# Altium PCB PCB1.pcbdoc (part 3 of 4)
Units mil, origin at the board's own origin, x right, y up, seen from the top; angles counter-clockwise.
Board outline 3067 x 4292.31 mil, 4 copper layers (Top Layer, Inner1, Inner2, Bottom Layer); 120 components, 131 nets, 693 pads, 342 vias.
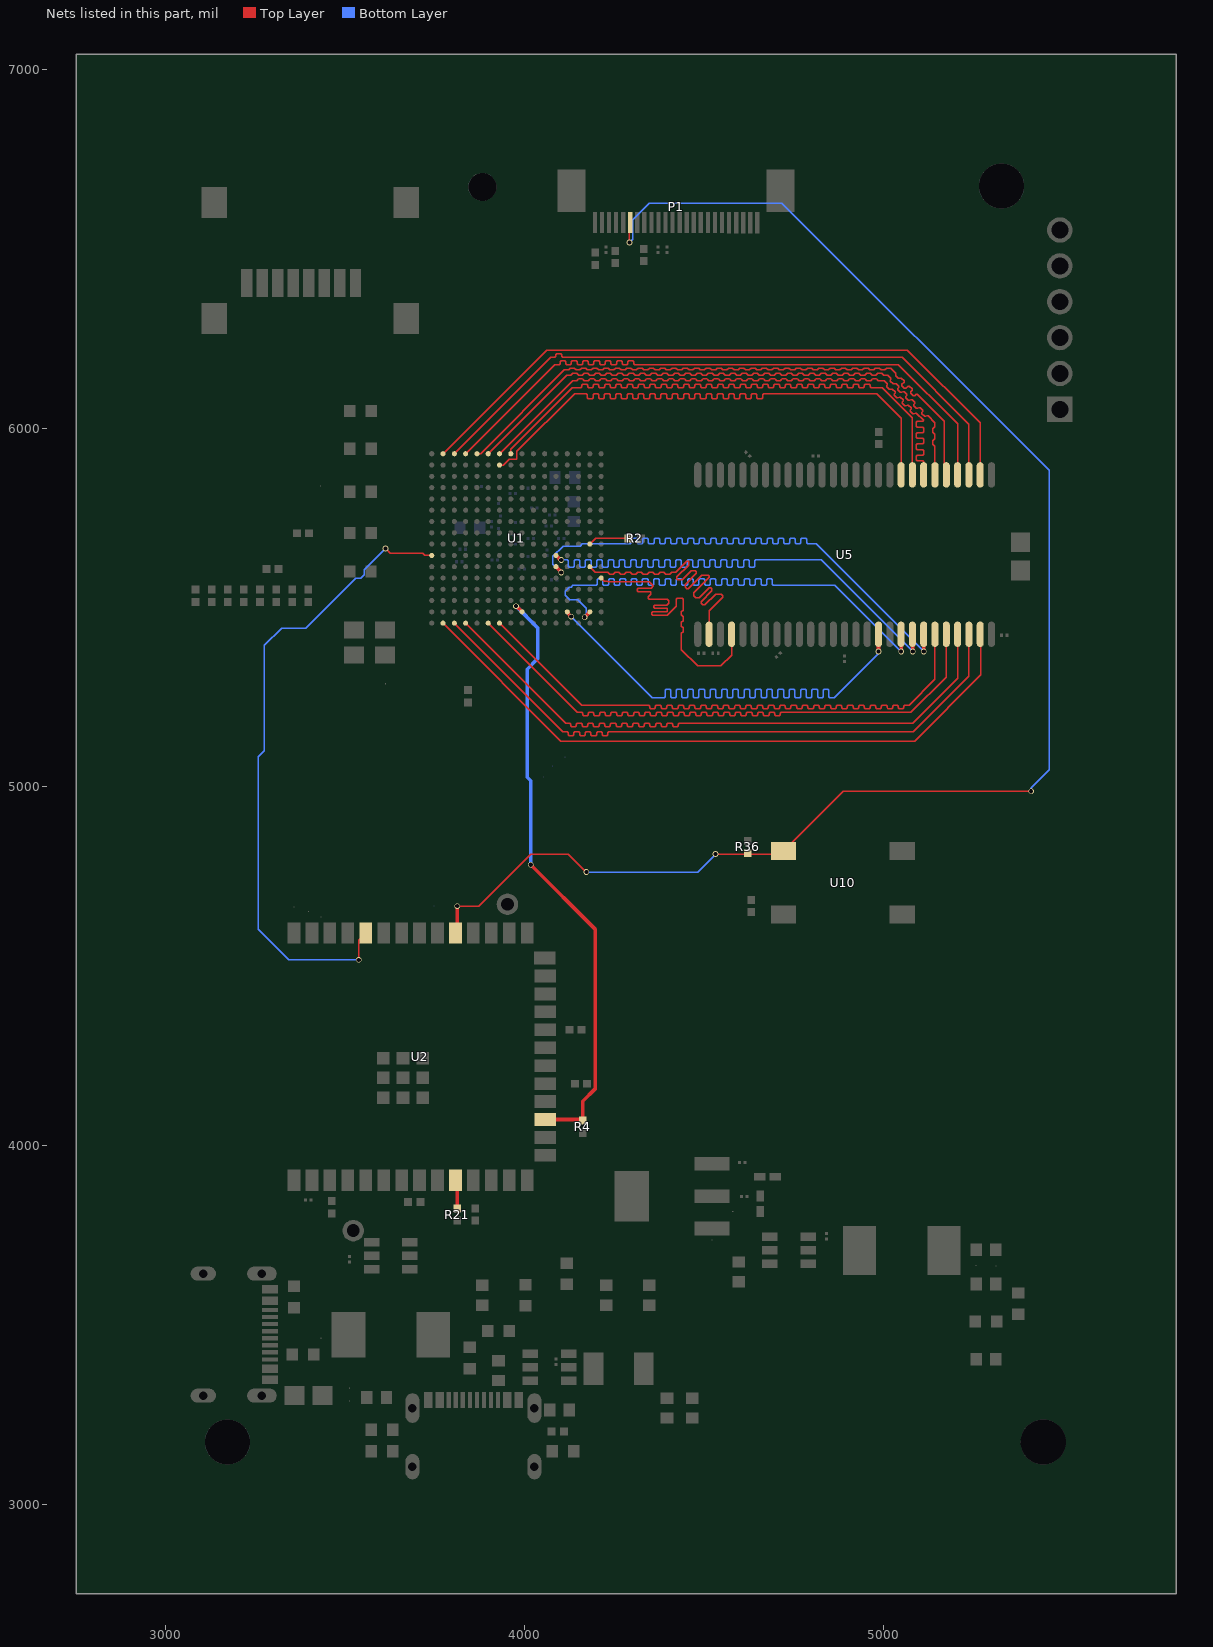
[diagram p5: the nets of this part, all layers, seen from the top]

## Via types
v1: diameter 15.75, hole 11.81, Top Layer to Bottom Layer, 336 vias
v2: diameter 19.68, hole 11.81, Top Layer to Bottom Layer, 4 vias
v3: diameter 39.37, hole 19.68, Top Layer to Bottom Layer, 2 vias

## Nets (pads, with @x,y where several pads share a name; then routed paths per layer and width w, separated by ;. In a path a pad name is that pad's centre, name@x,y a point inside that pad or via, vN(x,y) a via of type N, cw(c..) or ccw(c..) an arc to the next point about the centre after c; other vN are vias at no path point) (continued)
PROGRAMN: pad.55@4007.32,5026.48 R4.2 U1.R9 U2.17 | length 1688.8
  Top Layer w10: v1(3975.87,5503.76) 3976.9,5503.76 U1.R9@3993.07,5487.6 ; v1(4017.32,4782.31) 4196.47,4603.16 4196.47,4157.14 4162.31,4122.98 R4.2@4162.31,4069.36 4159.35,4072.32 U2.17@4062.51,4072.32
  Bottom Layer w10: v1(3975.87,5503.76) 4036.17,5443.46 4036.17,5356.46 4007.32,5327.61 pad.55@4007.32,5026.48 4017.32,5016.48 v1(4017.32,4782.31)
RESET: P1.6 R36.1 U2.31 U10.1 | length 4378.2
  Top Layer w3.94: v1(3812.12,4667.31) 3872.32,4667.31 4017.32,4812.31 4122.31,4812.31 v1(4172.31,4762.31) ; v1(4292.31,6517.31) 4292.31,6570.65 P1.6@4294.54,6572.88 ; v1(4532.31,4812.31) 4713.38,4812.31 U10.1@4721.97,4820.9 4888.38,4987.31 v1(5412.31,4987.31)
  Top Layer w10: U2.31@3812.12,4591.81 v1(3812.12,4667.31)
  Bottom Layer w3.94: v1(4172.31,4762.31) 4482.31,4762.31 v1(4532.31,4812.31) ; v1(4292.31,6517.31) 4301.22,6526.22 4301.22,6581.22 4347.31,6627.31 4717.31,6627.31 5462.31,5882.31 5462.31,5047.31 5412.31,4997.31 v1(5412.31,4987.31)
RX: U1.K1 U2.36 | length 1792.2
  Top Layer w3.94: v1(3537.32,4517.31) 3537.32,4572 U2.36@3557.12,4591.81 ; v1(3612.37,5664.48) 3625.27,5651.58 3715.77,5651.58 3722.27,5645.07 U1.K1@3741.09,5645.07
  Bottom Layer w3.94: v1(3537.32,4517.31) 3342.32,4517.31 3257.32,4602.31 3257.32,5083.73 3274.63,5101.04 3274.63,5394.63 3322.32,5442.31 3390.2,5442.31 3529.37,5581.49 3543.87,5581.49 3553.14,5590.76 3553.14,5605.26 v1(3612.37,5664.48)
SCL: R21.1 U2.10 | length 75.6
  Top Layer w10: U2.10@3812.12,3902.82 3812.32,3902.63 R21.1@3812.32,3827.32
SD_A0: U1.T6 U5.23 | length 1783
  Top Layer w3.94: U1.T6@3898.57,5456.1 4147.35,5207.31 4159.17,5207.31 4161.95,5204.53 4161.95,5200.1 4164.73,5197.31 4174.91,5197.31 4177.7,5200.1 4177.7,5204.53 4180.48,5207.31 4190.66,5207.31 4193.45,5204.53 4193.45,5200.1 4196.23,5197.31 4206.41,5197.31 4209.19,5200.1 4209.19,5204.53 4211.98,5207.31 4222.16,5207.31 4224.94,5204.53 4224.94,5200.1 4227.73,5197.31 4237.91,5197.31 4240.69,5200.1 4240.69,5204.53 4243.47,5207.31 4253.65,5207.31 4256.44,5204.53 4256.44,5200.1 4259.22,5197.31 4269.4,5197.31 4272.19,5200.1 4272.19,5204.53 4274.97,5207.31 4285.15,5207.31 4287.93,5204.53 4287.93,5200.1 4290.72,5197.31 4300.9,5197.31 4303.68,5200.1 4303.68,5204.53 4306.47,5207.31 4316.65,5207.31 4319.43,5204.53 4319.43,5200.1 4322.21,5197.31 4332.39,5197.31 4335.18,5200.1 4335.18,5204.53 4337.96,5207.31 4348.14,5207.31 4350.93,5204.53 4350.93,5200.1 4353.71,5197.31 4363.89,5197.31 4366.67,5200.1 4366.67,5204.53 4369.46,5207.31 4379.64,5207.31 4382.42,5204.53 4382.42,5200.1 4385.21,5197.31 4395.39,5197.31 4398.17,5200.1 4398.17,5204.53 4400.95,5207.31 4411.13,5207.31 4413.92,5204.53 4413.92,5200.1 4416.7,5197.31 4426.88,5197.31 4429.67,5200.1 4429.67,5204.53 4432.45,5207.31 4442.63,5207.31 4445.41,5204.53 4445.41,5200.1 4448.2,5197.31 4458.38,5197.31 4461.16,5200.1 4461.16,5204.53 4463.95,5207.31 4474.13,5207.31 4476.91,5204.53 4476.91,5200.1 4479.69,5197.31 4489.87,5197.31 4492.66,5200.1 4492.66,5204.53 4495.44,5207.31 4505.62,5207.31 4508.41,5204.53 4508.41,5200.1 4511.19,5197.31 4521.37,5197.31 4524.15,5200.1 4524.15,5204.53 4526.94,5207.31 4537.12,5207.31 4539.9,5204.53 4539.9,5200.1 4542.69,5197.31 4552.87,5197.31 4555.65,5200.1 4555.65,5204.53 4558.43,5207.31 4568.61,5207.31 4571.4,5204.53 4571.4,5200.1 4574.18,5197.31 4584.36,5197.31 4587.15,5200.1 4587.15,5204.53 4589.93,5207.31 4600.11,5207.31 4602.89,5204.53 4602.89,5200.1 4605.68,5197.31 4615.86,5197.31 4618.64,5200.1 4618.64,5204.53 4621.43,5207.31 4631.61,5207.31 4634.39,5204.53 4634.39,5200.1 4637.17,5197.31 4647.35,5197.31 4650.14,5200.1 4650.14,5204.53 4652.92,5207.31 4663.1,5207.31 4665.89,5204.53 4665.89,5200.1 4668.67,5197.31 4678.85,5197.31 4681.63,5200.1 4681.63,5204.53 4684.42,5207.31 4694.6,5207.31 4697.38,5204.53 4697.38,5200.1 4700.17,5197.31 4710.35,5197.31 4713.13,5200.1 4713.13,5204.53 4715.91,5207.31 5077.31,5207.31 5175.78,5305.78 U5.23@5175.78,5425.19
SD_A1: U1.T4 U5.24 | length 1796.6
  Top Layer w3.94: U1.T4@3835.59,5456.1 4114.36,5177.31 4126.18,5177.31 4128.96,5174.53 4128.96,5170.1 4131.74,5167.31 4141.92,5167.31 4144.71,5170.1 4144.71,5174.53 4147.49,5177.31 4157.67,5177.31 4160.46,5174.53 4160.46,5170.1 4163.24,5167.31 4173.42,5167.31 4176.2,5170.1 4176.2,5174.53 4178.99,5177.31 4189.17,5177.31 4191.95,5174.53 4191.95,5170.1 4194.74,5167.31 4204.92,5167.31 4207.7,5170.1 4207.7,5174.53 4210.48,5177.31 4220.66,5177.31 4223.45,5174.53 4223.45,5170.1 4226.23,5167.31 4236.41,5167.31 4239.2,5170.1 4239.2,5174.53 4241.98,5177.31 4252.16,5177.31 4254.94,5174.53 4254.94,5170.1 4257.73,5167.31 4267.91,5167.31 4270.69,5170.1 4270.69,5174.53 4273.48,5177.31 4283.66,5177.31 4286.44,5174.53 4286.44,5170.1 4289.22,5167.31 4299.4,5167.31 4302.19,5170.1 4302.19,5174.53 4304.97,5177.31 4315.15,5177.31 4317.94,5174.53 4317.94,5170.1 4320.72,5167.31 4330.9,5167.31 4333.68,5170.1 4333.68,5174.53 4336.47,5177.31 4346.65,5177.31 4349.43,5174.53 4349.43,5170.1 4352.22,5167.31 4362.4,5167.31 4365.18,5170.1 4365.18,5174.53 4367.96,5177.31 4378.14,5177.31 4380.93,5174.53 4380.93,5170.1 4383.71,5167.31 4393.89,5167.31 4396.68,5170.1 4396.68,5174.53 4399.46,5177.31 4409.64,5177.31 4412.42,5174.53 4412.42,5170.1 4415.21,5167.31 4425.39,5167.31 4428.17,5170.1 4428.17,5174.53 4430.96,5177.31 5082.31,5177.31 5207.31,5302.31 U5.24@5207.31,5425.15
SD_A2: U1.T3 U5.25 | length 1806.1
  Top Layer w3.94: U1.T3@3804.09,5456.1 4106.4,5153.77 4119.13,5153.77 4121.91,5150.99 4121.91,5145.1 4124.69,5142.31 4134.87,5142.31 4137.66,5145.1 4137.66,5150.99 4140.44,5153.77 4150.62,5153.77 4153.41,5150.99 4153.41,5145.1 4156.19,5142.31 4166.37,5142.31 4169.15,5145.1 4169.15,5150.99 4171.94,5153.77 4182.12,5153.77 4184.9,5150.99 4184.9,5145.1 4187.69,5142.31 4197.87,5142.31 4200.65,5145.1 4200.65,5150.99 4203.43,5153.77 4213.61,5153.77 4216.4,5150.99 4216.4,5145.1 4219.18,5142.31 4229.36,5142.31 4232.15,5145.1 4232.15,5150.99 4234.93,5153.77 5083.77,5153.77 5238.77,5308.77 U5.25@5238.77,5425.19
SD_A3: U1.T2 U5.26 | length 1826.3
  Top Layer w3.94: U1.T2@3772.59,5456.1 4101.38,5127.31 5087.31,5127.31 5272.31,5312.31 5272.31,5423.14 U5.26@5270.27,5425.19
SD_A4: U1.A2 U5.29 | length 1846.3
  Top Layer w3.94: U1.A2@3772.59,5928.53 4061.38,6217.31 5067.31,6217.31 5270.27,6014.36 U5.29@5270.27,5869.44
SD_A5: U1.A3 U5.30 | length 1778.1
  Top Layer w3.94: U1.A3@3804.09,5928.53 4072.86,6197.31 4084.68,6197.31 4087.46,6200.1 4087.46,6204.53 4090.24,6207.31 4100.42,6207.31 4103.21,6204.53 4103.21,6200.1 4105.99,6197.31 5052.31,6197.31 5238.77,6010.85 U5.30@5238.77,5869.44
SD_A6: U1.A4 U5.31 | length 1780.3
  Top Layer w3.94: U1.A4@3835.59,5928.53 4084.36,6177.31 4096.18,6177.31 4098.96,6180.1 4098.96,6184.53 4101.74,6187.31 4111.92,6187.31 4114.71,6184.53 4114.71,6180.1 4117.49,6177.31 4127.67,6177.31 4130.46,6180.1 4130.46,6184.53 4133.24,6187.31 4143.42,6187.31 4146.2,6184.53 4146.2,6180.1 4148.99,6177.31 4159.17,6177.31 4161.95,6180.1 4161.95,6184.53 4164.74,6187.31 4174.92,6187.31 4177.7,6184.53 4177.7,6180.1 4180.48,6177.31 4190.66,6177.31 4193.45,6180.1 4193.45,6184.53 4196.23,6187.31 4206.41,6187.31 4209.2,6184.53 4209.2,6180.1 4211.98,6177.31 4222.16,6177.31 4224.94,6180.1 4224.94,6184.53 4227.73,6187.31 4237.91,6187.31 4240.69,6184.53 4240.69,6180.1 4243.48,6177.31 4253.66,6177.31 4256.44,6180.1 4256.44,6184.53 4259.22,6187.31 4269.4,6187.31 4272.19,6184.53 4272.19,6180.1 4274.97,6177.31 4285.15,6177.31 4287.94,6180.1 4287.94,6184.53 4290.72,6187.31 4300.9,6187.31 4303.68,6184.53 4303.68,6180.1 4306.47,6177.31 5042.31,6177.31 5207.27,6012.35 U5.31@5207.27,5869.44
SD_A7: U1.A5 U5.32 | length 1774.3
  Top Layer w3.94: U1.A5@3867.07,5928.53 3877.31,5928.53 4111.09,6162.31 4122.9,6162.31 4127.9,6167.31 4138.65,6167.31 4143.65,6162.31 4154.39,6162.31 4159.39,6167.31 4170.14,6167.31 4175.14,6162.31 4185.89,6162.31 4190.89,6167.31 4201.64,6167.31 4206.64,6162.31 4217.39,6162.31 4222.39,6167.31 4233.13,6167.31 4238.13,6162.31 4248.88,6162.31 4253.88,6167.31 4264.63,6167.31 4269.63,6162.31 4280.38,6162.31 4285.38,6167.31 4296.13,6167.31 4301.13,6162.31 4311.87,6162.31 4316.87,6167.31 4327.62,6167.31 4332.62,6162.31 4343.37,6162.31 4348.37,6167.31 4359.12,6167.31 4364.12,6162.31 4374.87,6162.31 4379.87,6167.31 4390.61,6167.31 4395.61,6162.31 4406.36,6162.31 4411.36,6167.31 4422.11,6167.31 4427.11,6162.31 4437.86,6162.31 4442.86,6167.31 4453.61,6167.31 4458.61,6162.31 4469.35,6162.31 4474.35,6167.31 4485.1,6167.31 4490.1,6162.31 4500.85,6162.31 4505.85,6167.31 4516.6,6167.31 4521.6,6162.31 4532.35,6162.31 4537.35,6167.31 4548.09,6167.31 4553.09,6162.31 4563.84,6162.31 4568.84,6167.31 4579.59,6167.31 4584.59,6162.31 4595.34,6162.31 4600.34,6167.31 4611.09,6167.31 4616.09,6162.31 4626.83,6162.31 4631.83,6167.31 4642.58,6167.31 4647.58,6162.31 4658.33,6162.31 4663.33,6167.31 4674.08,6167.31 4679.08,6162.31 4689.83,6162.31 4694.83,6167.31 4705.57,6167.31 4710.57,6162.31 4721.32,6162.31 4726.32,6167.31 4737.07,6167.31 4742.07,6162.31 4752.82,6162.31 4757.82,6167.31 4768.57,6167.31 4773.57,6162.31 4784.31,6162.31 4789.31,6167.31 4800.06,6167.31 4805.06,6162.31 4815.81,6162.31 4820.81,6167.31 4831.56,6167.31 4836.56,6162.31 4847.31,6162.31 4852.31,6167.31 4863.05,6167.31 4868.05,6162.31 4878.8,6162.31 4883.8,6167.31 4894.55,6167.31 4899.55,6162.31 4910.3,6162.31 4915.3,6167.31 4926.05,6167.31 4931.05,6162.31 4941.79,6162.31 4946.79,6167.31 4957.54,6167.31 4962.54,6162.31 4973.29,6162.31 4978.29,6167.31 4989.04,6167.31 4994.04,6162.31 5004.79,6162.31 5009.79,6167.31 5020.53,6167.31 5035.19,6152.66 5035.19,6145.61 5042.39,6138.41 5046.32,6138.41 5046.8,6138.89 5050.74,6138.89 5057.94,6131.69 5057.94,6127.76 5051.87,6121.68 5051.87,6117.75 5059.06,6110.55 5063,6110.55 5069.07,6116.62 5073.01,6116.62 5080.21,6109.42 5080.21,6105.48 5076.05,6101.32 5076.05,6097.39 5083.25,6090.19 5087.18,6090.19 5091.34,6094.35 5095.28,6094.35 5170.78,6018.85 5170.78,5874.44 U5.32@5175.78,5869.44
SD_A8: U1.A6 U5.33 | length 1748.8
  Top Layer w3.94: U1.A6@3898.57,5928.53 4117.35,6147.31 4129.17,6147.31 4131.95,6150.1 4131.95,6150.5 4134.73,6153.29 4144.91,6153.29 4147.7,6150.5 4147.7,6150.1 4150.48,6147.31 4160.66,6147.31 4163.45,6150.1 4163.45,6150.5 4166.23,6153.29 4176.41,6153.29 4179.19,6150.5 4179.19,6150.1 4181.98,6147.31 4192.16,6147.31 4194.94,6150.1 4194.94,6150.5 4197.73,6153.29 4207.91,6153.29 4210.69,6150.5 4210.69,6150.1 4213.47,6147.31 4223.65,6147.31 4226.44,6150.1 4226.44,6150.5 4229.22,6153.29 4239.4,6153.29 4242.19,6150.5 4242.19,6150.1 4244.97,6147.31 4255.15,6147.31 4257.93,6150.1 4257.93,6150.5 4260.72,6153.29 4270.9,6153.29 4273.68,6150.5 4273.68,6150.1 4276.47,6147.31 4286.65,6147.31 4289.43,6150.1 4289.43,6150.5 4292.21,6153.29 4302.39,6153.29 4305.18,6150.5 4305.18,6150.1 4307.96,6147.31 4318.14,6147.31 4320.93,6150.1 4320.93,6150.5 4323.71,6153.29 4333.89,6153.29 4336.67,6150.5 4336.67,6150.1 4339.46,6147.31 4349.64,6147.31 4352.42,6150.1 4352.42,6150.5 4355.21,6153.29 4365.39,6153.29 4368.17,6150.5 4368.17,6150.1 4370.95,6147.31 4381.13,6147.31 4383.92,6150.1 4383.92,6150.5 4386.7,6153.29 4396.88,6153.29 4399.67,6150.5 4399.67,6150.1 4402.45,6147.31 4412.63,6147.31 4415.41,6150.1 4415.41,6150.5 4418.2,6153.29 4428.38,6153.29 4431.16,6150.5 4431.16,6150.1 4433.95,6147.31 4444.13,6147.31 4446.91,6150.1 4446.91,6150.5 4449.69,6153.29 4459.87,6153.29 4462.66,6150.5 4462.66,6150.1 4465.44,6147.31 4475.62,6147.31 4478.41,6150.1 4478.41,6150.5 4481.19,6153.29 4491.37,6153.29 4494.15,6150.5 4494.15,6150.1 4496.94,6147.31 4507.12,6147.31 4509.9,6150.1 4509.9,6150.5 4512.69,6153.29 4522.87,6153.29 4525.65,6150.5 4525.65,6150.1 4528.43,6147.31 4538.61,6147.31 4541.4,6150.1 4541.4,6150.5 4544.18,6153.29 4554.36,6153.29 4557.15,6150.5 4557.15,6150.1 4559.93,6147.31 4570.11,6147.31 4572.89,6150.1 4572.89,6150.5 4575.68,6153.29 4585.86,6153.29 4588.64,6150.5 4588.64,6150.1 4591.43,6147.31 4601.61,6147.31 4604.39,6150.1 4604.39,6150.5 4607.17,6153.29 4617.35,6153.29 4620.14,6150.5 4620.14,6150.1 4622.92,6147.31 4633.1,6147.31 4635.89,6150.1 4635.89,6150.5 4638.67,6153.29 4648.85,6153.29 4651.63,6150.5 4651.63,6150.1 4654.42,6147.31 4664.6,6147.31 4667.38,6150.1 4667.38,6150.5 4670.17,6153.29 4680.35,6153.29 4683.13,6150.5 4683.13,6150.1 4685.91,6147.31 4696.1,6147.31 4698.88,6150.1 4698.88,6150.5 4701.66,6153.29 4711.84,6153.29 4714.63,6150.5 4714.63,6150.1 4717.41,6147.31 4727.59,6147.31 4730.38,6150.1 4730.38,6150.5 4733.16,6153.29 4743.34,6153.29 4746.12,6150.5 4746.12,6150.1 4748.91,6147.31 4759.09,6147.31 4761.87,6150.1 4761.87,6150.5 4764.65,6153.29 4774.84,6153.29 4777.62,6150.5 4777.62,6150.1 4780.4,6147.31 4790.58,6147.31 4793.37,6150.1 4793.37,6150.5 4796.15,6153.29 4806.33,6153.29 4809.12,6150.5 4809.12,6150.1 4811.9,6147.31 4822.08,6147.31 4824.86,6150.1 4824.86,6150.5 4827.65,6153.29 4837.83,6153.29 4840.61,6150.5 4840.61,6150.1 4843.4,6147.31 4853.58,6147.31 4856.36,6150.1 4856.36,6150.5 4859.14,6153.29 4869.32,6153.29 4872.11,6150.5 4872.11,6150.1 4874.89,6147.31 4885.07,6147.31 4887.86,6150.1 4887.86,6150.5 4890.64,6153.29 4900.82,6153.29 4903.6,6150.5 4903.6,6150.1 4906.39,6147.31 4916.57,6147.31 4919.35,6150.1 4919.35,6150.5 4922.14,6153.29 4932.32,6153.29 4935.1,6150.5 4935.1,6150.1 4937.88,6147.31 4948.06,6147.31 4950.85,6150.1 4950.85,6150.5 4953.63,6153.29 4963.81,6153.29 4966.6,6150.5 4966.6,6150.1 4969.38,6147.31 4979.56,6147.31 4982.34,6150.1 4982.34,6150.5 4985.13,6153.29 4995.31,6153.29 4998.09,6150.5 4998.09,6150.1 5000.88,6147.31 5012.31,6147.31 5020.67,6138.96 5020.67,6135.03 5020.19,6134.55 5020.19,6130.61 5027.39,6123.41 5031.32,6123.41 5031.8,6123.89 5035.74,6123.89 5042.94,6116.69 5042.94,6112.76 5040.76,6110.58 5040.76,6106.64 5047.96,6099.44 5051.89,6099.44 5054.07,6101.62 5058.01,6101.62 5065.21,6094.42 5065.21,6090.48 5063.03,6088.3 5063.03,6084.37 5070.23,6077.17 5074.16,6077.17 5076.34,6079.35 5080.28,6079.35 5087.48,6072.15 5087.48,6068.21 5085.3,6066.03 5085.3,6062.1 5092.5,6054.9 5096.44,6054.9 5098.62,6057.08 5102.55,6057.08 5109.75,6049.88 5109.75,6045.94 5107.92,6044.11 5107.92,6040.17 5115.12,6032.97 5119.05,6032.97 5120.89,6034.81 5124.82,6034.81 5144.28,6015.35 5144.28,6003.53 5141.5,6000.75 5140.83,6000.75 5138.04,5997.97 5138.04,5987.79 5140.83,5985 5141.5,5985 5144.28,5982.22 5144.28,5970.41 5141.5,5967.62 5140.83,5967.62 5138.04,5964.84 5138.04,5954.66 5140.83,5951.88 5141.5,5951.88 5144.28,5949.09 U5.33@5144.28,5869.44
SD_A9: U1.A7 U5.34 | length 1787.7
  Top Layer w3.94: U1.A7@3930.07,5928.53 4133.85,6132.31 4145.67,6132.31 4148.45,6135.1 4148.45,6135.5 4151.23,6138.29 4161.41,6138.29 4164.2,6135.5 4164.2,6135.1 4166.98,6132.31 4177.16,6132.31 4179.95,6135.1 4179.95,6135.5 4182.73,6138.29 4192.91,6138.29 4195.69,6135.5 4195.69,6135.1 4198.48,6132.31 4208.66,6132.31 4211.44,6135.1 4211.44,6135.5 4214.23,6138.29 4224.41,6138.29 4227.19,6135.5 4227.19,6135.1 4229.97,6132.31 4240.15,6132.31 4242.94,6135.1 4242.94,6135.5 4245.72,6138.29 4255.9,6138.29 4258.69,6135.5 4258.69,6135.1 4261.47,6132.31 4271.65,6132.31 4274.43,6135.1 4274.43,6135.5 4277.22,6138.29 4287.4,6138.29 4290.18,6135.5 4290.18,6135.1 4292.97,6132.31 4303.15,6132.31 4305.93,6135.1 4305.93,6135.5 4308.71,6138.29 4318.89,6138.29 4321.68,6135.5 4321.68,6135.1 4324.46,6132.31 4334.64,6132.31 4337.43,6135.1 4337.43,6135.5 4340.21,6138.29 4350.39,6138.29 4353.17,6135.5 4353.17,6135.1 4355.96,6132.31 4366.14,6132.31 4368.92,6135.1 4368.92,6135.5 4371.71,6138.29 4381.89,6138.29 4384.67,6135.5 4384.67,6135.1 4387.45,6132.31 4397.63,6132.31 4400.42,6135.1 4400.42,6135.5 4403.2,6138.29 4413.38,6138.29 4416.17,6135.5 4416.17,6135.1 4418.95,6132.31 4429.13,6132.31 4431.91,6135.1 4431.91,6135.5 4434.7,6138.29 4444.88,6138.29 4447.66,6135.5 4447.66,6135.1 4450.45,6132.31 4460.63,6132.31 4463.41,6135.1 4463.41,6135.5 4466.19,6138.29 4476.37,6138.29 4479.16,6135.5 4479.16,6135.1 4481.94,6132.31 4492.12,6132.31 4494.91,6135.1 4494.91,6135.5 4497.69,6138.29 4507.87,6138.29 4510.65,6135.5 4510.65,6135.1 4513.44,6132.31 4523.62,6132.31 4526.4,6135.1 4526.4,6135.5 4529.19,6138.29 4539.37,6138.29 4542.15,6135.5 4542.15,6135.1 4544.93,6132.31 4555.11,6132.31 4557.9,6135.1 4557.9,6135.5 4560.68,6138.29 4570.86,6138.29 4573.65,6135.5 4573.65,6135.1 4576.43,6132.31 4586.61,6132.31 4589.39,6135.1 4589.39,6135.5 4592.18,6138.29 4602.36,6138.29 4605.14,6135.5 4605.14,6135.1 4607.93,6132.31 4618.11,6132.31 4620.89,6135.1 4620.89,6135.5 4623.67,6138.29 4633.85,6138.29 4636.64,6135.5 4636.64,6135.1 4639.42,6132.31 4649.6,6132.31 4652.39,6135.1 4652.39,6135.5 4655.17,6138.29 4665.35,6138.29 4668.13,6135.5 4668.13,6135.1 4670.92,6132.31 4681.1,6132.31 4683.88,6135.1 4683.88,6135.5 4686.67,6138.29 4696.85,6138.29 4699.63,6135.5 4699.63,6135.1 4702.41,6132.31 4712.6,6132.31 4715.38,6135.1 4715.38,6135.5 4718.16,6138.29 4728.34,6138.29 4731.13,6135.5 4731.13,6135.1 4733.91,6132.31 4744.09,6132.31 4746.88,6135.1 4746.88,6135.5 4749.66,6138.29 4759.84,6138.29 4762.62,6135.5 4762.62,6135.1 4765.41,6132.31 4775.59,6132.31 4778.37,6135.1 4778.37,6135.5 4781.15,6138.29 4791.34,6138.29 4794.12,6135.5 4794.12,6135.1 4796.9,6132.31 4807.08,6132.31 4809.87,6135.1 4809.87,6135.5 4812.65,6138.29 4822.83,6138.29 4825.62,6135.5 4825.62,6135.1 4828.4,6132.31 4838.58,6132.31 4841.36,6135.1 4841.36,6135.5 4844.15,6138.29 4854.33,6138.29 4857.11,6135.5 4857.11,6135.1 4859.9,6132.31 4870.08,6132.31 4872.86,6135.1 4872.86,6135.5 4875.64,6138.29 4885.82,6138.29 4888.61,6135.5 4888.61,6135.1 4891.39,6132.31 4901.57,6132.31 4904.36,6135.1 4904.36,6135.5 4907.14,6138.29 4917.32,6138.29 4920.1,6135.5 4920.1,6135.1 4922.89,6132.31 4933.07,6132.31 4935.85,6135.1 4935.85,6135.5 4938.64,6138.29 4948.82,6138.29 4951.6,6135.5 4951.6,6135.1 4954.38,6132.31 4964.56,6132.31 4967.35,6135.1 4967.35,6135.5 4970.13,6138.29 4980.31,6138.29 4983.1,6135.5 4983.1,6135.1 4985.88,6132.31 5002.31,6132.31 5010.67,6123.96 5010.67,6120.03 5010.19,6119.55 5010.19,6115.61 5017.39,6108.41 5021.32,6108.41 5021.8,6108.89 5025.74,6108.89 5032.94,6101.69 5032.94,6097.76 5030.76,6095.58 5030.76,6091.64 5037.96,6084.44 5041.89,6084.44 5044.07,6086.62 5048.01,6086.62 5055.21,6079.42 5055.21,6075.48 5053.03,6073.3 5053.03,6069.37 5060.23,6062.17 5064.16,6062.17 5066.34,6064.35 5070.28,6064.35 5077.48,6057.15 5077.48,6053.21 5075.3,6051.03 5075.3,6047.1 5082.5,6039.9 5086.44,6039.9 5088.62,6042.08 5092.55,6042.08 5112.78,6021.85 5112.78,6021.53 5110,6018.74 5095.1,6018.74 5092.31,6015.96 5092.31,6005.78 5095.1,6003 5110,6003 5112.78,6000.21 5112.78,5990.03 5110,5987.25 5095.1,5987.25 5092.31,5984.46 5092.31,5974.28 5095.1,5971.5 5110,5971.5 5112.78,5968.72 5112.78,5958.54 5110,5955.75 5095.1,5955.75 5092.31,5952.97 5092.31,5942.79 5095.1,5940 5110,5940 5112.78,5937.22 5112.78,5927.04 5110,5924.26 5095.1,5924.26 5092.31,5921.47 5092.31,5911.29 5095.1,5908.51 5110,5908.51 5112.78,5905.72 U5.34@5112.78,5869.44
SD_A10: U1.T7 U5.22 | length 1774.7
  Top Layer w3.94: U1.T7@3930.07,5456.1 4158.85,5227.31 4346.27,5227.31 4349.06,5224.53 4349.06,5220.1 4351.84,5217.31 4362.02,5217.31 4364.81,5220.1 4364.81,5224.53 4367.59,5227.31 4377.77,5227.31 4380.55,5224.53 4380.55,5220.1 4383.34,5217.31 4393.52,5217.31 4396.3,5220.1 4396.3,5224.53 4399.09,5227.31 4409.27,5227.31 4412.05,5224.53 4412.05,5220.1 4414.83,5217.31 4425.02,5217.31 4427.8,5220.1 4427.8,5224.53 4430.58,5227.31 4440.76,5227.31 4443.55,5224.53 4443.55,5220.1 4446.33,5217.31 4456.51,5217.31 4459.29,5220.1 4459.29,5224.53 4462.08,5227.31 4472.26,5227.31 4475.04,5224.53 4475.04,5220.1 4477.83,5217.31 4488.01,5217.31 4490.79,5220.1 4490.79,5224.53 4493.57,5227.31 4503.76,5227.31 4506.54,5224.53 4506.54,5220.1 4509.32,5217.31 4519.5,5217.31 4522.29,5220.1 4522.29,5224.53 4525.07,5227.31 4535.25,5227.31 4538.04,5224.53 4538.04,5220.1 4540.82,5217.31 4551,5217.31 4553.78,5220.1 4553.78,5224.53 4556.57,5227.31 4566.75,5227.31 4569.53,5224.53 4569.53,5220.1 4572.31,5217.31 4582.5,5217.31 4585.28,5220.1 4585.28,5224.53 4588.06,5227.31 4598.24,5227.31 4601.03,5224.53 4601.03,5220.1 4603.81,5217.31 4613.99,5217.31 4616.78,5220.1 4616.78,5224.53 4619.56,5227.31 4629.74,5227.31 4632.52,5224.53 4632.52,5220.1 4635.31,5217.31 4645.49,5217.31 4648.27,5220.1 4648.27,5224.53 4651.06,5227.31 4661.24,5227.31 4664.02,5224.53 4664.02,5220.1 4666.8,5217.31 4676.98,5217.31 4679.77,5220.1 4679.77,5224.53 4682.55,5227.31 4692.73,5227.31 4695.52,5224.53 4695.52,5220.1 4698.3,5217.31 4708.48,5217.31 4711.26,5220.1 4711.26,5224.53 4714.05,5227.31 4724.23,5227.31 4727.01,5224.53 4727.01,5220.1 4729.8,5217.31 4739.98,5217.31 4742.76,5220.1 4742.76,5224.53 4745.54,5227.31 4755.72,5227.31 4758.51,5224.53 4758.51,5220.1 4761.29,5217.31 4771.47,5217.31 4774.26,5220.1 4774.26,5224.53 4777.04,5227.31 4787.22,5227.31 4790,5224.53 4790,5220.1 4792.79,5217.31 4802.97,5217.31 4805.75,5220.1 4805.75,5224.53 4808.54,5227.31 4818.72,5227.31 4821.5,5224.53 4821.5,5220.1 4824.28,5217.31 4834.46,5217.31 4837.25,5220.1 4837.25,5224.53 4840.03,5227.31 4850.21,5227.31 4853,5224.53 4853,5220.1 4855.78,5217.31 4865.96,5217.31 4868.74,5220.1 4868.74,5224.53 4871.53,5227.31 4881.71,5227.31 4884.49,5224.53 4884.49,5220.1 4887.28,5217.31 4897.46,5217.31 4900.24,5220.1 4900.24,5224.53 4903.02,5227.31 4913.2,5227.31 4915.99,5224.53 4915.99,5220.1 4918.77,5217.31 4928.95,5217.31 4931.74,5220.1 4931.74,5224.53 4934.52,5227.31 4944.7,5227.31 4947.48,5224.53 4947.48,5220.1 4950.27,5217.31 4960.45,5217.31 4963.23,5220.1 4963.23,5224.53 4966.02,5227.31 4976.2,5227.31 4978.98,5224.53 4978.98,5220.1 4981.76,5217.31 4991.94,5217.31 4994.73,5220.1 4994.73,5224.53 4997.51,5227.31 5007.69,5227.31 5010.48,5224.53 5010.48,5220.1 5013.26,5217.31 5023.44,5217.31 5026.22,5220.1 5026.22,5224.53 5029.01,5227.31 5039.19,5227.31 5041.97,5224.53 5041.97,5220.1 5044.76,5217.31 5054.94,5217.31 5057.72,5220.1 5057.72,5224.53 5060.5,5227.31 5072.31,5227.31 5144.28,5299.28 U5.22@5144.28,5425.19
SD_A11: U1.A8 U5.35 | length 1747.6
  Top Layer w3.94: U1.A8@3961.57,5928.53 3961.57,5941.56 4132.31,6112.31 4157.16,6112.31 4159.94,6115.1 4159.94,6119.53 4162.72,6122.31 4172.9,6122.31 4175.69,6119.53 4175.69,6115.1 4178.47,6112.31 4188.65,6112.31 4191.44,6115.1 4191.44,6119.53 4194.22,6122.31 4204.4,6122.31 4207.18,6119.53 4207.18,6115.1 4209.97,6112.31 4220.15,6112.31 4222.93,6115.1 4222.93,6119.53 4225.72,6122.31 4235.9,6122.31 4238.68,6119.53 4238.68,6115.1 4241.46,6112.31 4251.64,6112.31 4254.43,6115.1 4254.43,6119.53 4257.21,6122.31 4267.39,6122.31 4270.18,6119.53 4270.18,6115.1 4272.96,6112.31 4283.14,6112.31 4285.92,6115.1 4285.92,6119.53 4288.71,6122.31 4298.89,6122.31 4301.67,6119.53 4301.67,6115.1 4304.46,6112.31 4314.64,6112.31 4317.42,6115.1 4317.42,6119.53 4320.2,6122.31 4330.38,6122.31 4333.17,6119.53 4333.17,6115.1 4335.95,6112.31 4346.13,6112.31 4348.92,6115.1 4348.92,6119.53 4351.7,6122.31 4361.88,6122.31 4364.66,6119.53 4364.66,6115.1 4367.45,6112.31 4377.63,6112.31 4380.41,6115.1 4380.41,6119.53 4383.2,6122.31 4393.38,6122.31 4396.16,6119.53 4396.16,6115.1 4398.94,6112.31 4409.12,6112.31 4411.91,6115.1 4411.91,6119.53 4414.69,6122.31 4424.87,6122.31 4427.66,6119.53 4427.66,6115.1 4430.44,6112.31 4440.62,6112.31 4443.4,6115.1 4443.4,6119.53 4446.19,6122.31 4456.37,6122.31 4459.15,6119.53 4459.15,6115.1 4461.94,6112.31 4472.12,6112.31 4474.9,6115.1 4474.9,6119.53 4477.68,6122.31 4487.86,6122.31 4490.65,6119.53 4490.65,6115.1 4493.43,6112.31 4503.61,6112.31 4506.4,6115.1 4506.4,6119.53 4509.18,6122.31 4519.36,6122.31 4522.14,6119.53 4522.14,6115.1 4524.93,6112.31 4535.11,6112.31 4537.89,6115.1 4537.89,6119.53 4540.68,6122.31 4550.86,6122.31 4553.64,6119.53 4553.64,6115.1 4556.42,6112.31 4566.6,6112.31 4569.39,6115.1 4569.39,6119.53 4572.17,6122.31 4582.35,6122.31 4585.14,6119.53 4585.14,6115.1 4587.92,6112.31 4598.1,6112.31 4600.88,6115.1 4600.88,6119.53 4603.67,6122.31 4613.85,6122.31 4616.63,6119.53 4616.63,6115.1 4619.42,6112.31 4629.6,6112.31 4632.38,6115.1 4632.38,6119.53 4635.16,6122.31 4645.35,6122.31 4648.13,6119.53 4648.13,6115.1 4650.91,6112.31 4661.09,6112.31 4663.88,6115.1 4663.88,6119.53 4666.66,6122.31 4676.84,6122.31 4679.62,6119.53 4679.62,6115.1 4682.41,6112.31 4692.59,6112.31 4695.37,6115.1 4695.37,6119.53 4698.16,6122.31 4708.34,6122.31 4711.12,6119.53 4711.12,6115.1 4713.9,6112.31 4724.09,6112.31 4726.87,6115.1 4726.87,6119.53 4729.65,6122.31 4739.83,6122.31 4742.62,6119.53 4742.62,6115.1 4745.4,6112.31 4755.58,6112.31 4758.37,6115.1 4758.37,6119.53 4761.15,6122.31 4771.33,6122.31 4774.11,6119.53 4774.11,6115.1 4776.9,6112.31 4787.08,6112.31 4789.86,6115.1 4789.86,6119.53 4792.65,6122.31 4802.83,6122.31 4805.61,6119.53 4805.61,6115.1 4808.39,6112.31 4818.57,6112.31 4821.36,6115.1 4821.36,6119.53 4824.14,6122.31 4834.32,6122.31 4837.11,6119.53 4837.11,6115.1 4839.89,6112.31 4850.07,6112.31 4852.85,6115.1 4852.85,6119.53 4855.64,6122.31 4865.82,6122.31 4868.6,6119.53 4868.6,6115.1 4871.39,6112.31 4881.57,6112.31 4884.35,6115.1 4884.35,6119.53 4887.13,6122.31 4897.31,6122.31 4900.1,6119.53 4900.1,6115.1 4902.88,6112.31 4913.06,6112.31 4915.85,6115.1 4915.85,6119.53 4918.63,6122.31 4928.81,6122.31 4931.59,6119.53 4931.59,6115.1 4934.38,6112.31 4944.56,6112.31 4947.34,6115.1 4947.34,6119.53 4950.13,6122.31 4960.31,6122.31 4963.09,6119.53 4963.09,6115.1 4965.87,6112.31 4997.31,6112.31 5081.3,6028.34 U5.35@5081.3,5869.44
SD_A12: U1.B7 U5.36 | length 1776.4
  Top Layer w3.94: U1.B7@3930.07,5897.03 3940.3,5897.03 3956.76,5913.5 3977.02,5913.5 3978.03,5914.5 3978.03,5934.76 4139.51,6096.25 4172.59,6096.25 4175.38,6093.47 4175.38,6084.04 4178.16,6081.25 4188.34,6081.25 4191.12,6084.04 4191.12,6093.47 4193.91,6096.25 4204.09,6096.25 4206.87,6093.47 4206.87,6084.04 4209.66,6081.25 4219.84,6081.25 4222.62,6084.04 4222.62,6093.47 4225.4,6096.25 4235.59,6096.25 4238.37,6093.47 4238.37,6084.04 4241.15,6081.25 4251.33,6081.25 4254.12,6084.04 4254.12,6093.47 4256.9,6096.25 4267.08,6096.25 4269.87,6093.47 4269.87,6084.04 4272.65,6081.25 4282.83,6081.25 4285.61,6084.04 4285.61,6093.47 4288.4,6096.25 4298.58,6096.25 4301.36,6093.47 4301.36,6084.04 4304.15,6081.25 4314.33,6081.25 4317.11,6084.04 4317.11,6093.47 4319.89,6096.25 4330.07,6096.25 4332.86,6093.47 4332.86,6084.04 4335.64,6081.25 4345.82,6081.25 4348.61,6084.04 4348.61,6093.47 4351.39,6096.25 4361.57,6096.25 4364.35,6093.47 4364.35,6084.04 4367.14,6081.25 4377.32,6081.25 4380.1,6084.04 4380.1,6093.47 4382.89,6096.25 4393.07,6096.25 4395.85,6093.47 4395.85,6084.04 4398.63,6081.25 4408.81,6081.25 4411.6,6084.04 4411.6,6093.47 4414.38,6096.25 4424.56,6096.25 4427.35,6093.47 4427.35,6084.04 4430.13,6081.25 4440.31,6081.25 4443.09,6084.04 4443.09,6093.47 4445.88,6096.25 4456.06,6096.25 4458.84,6093.47 4458.84,6084.04 4461.63,6081.25 4471.81,6081.25 4474.59,6084.04 4474.59,6093.47 4477.37,6096.25 4487.55,6096.25 4490.34,6093.47 4490.34,6084.04 4493.12,6081.25 4503.3,6081.25 4506.09,6084.04 4506.09,6093.47 4508.87,6096.25 4519.05,6096.25 4521.83,6093.47 4521.83,6084.04 4524.62,6081.25 4534.8,6081.25 4537.58,6084.04 4537.58,6093.47 4540.37,6096.25 4550.55,6096.25 4553.33,6093.47 4553.33,6084.04 4556.11,6081.25 4566.29,6081.25 4569.08,6084.04 4569.08,6093.47 4571.86,6096.25 4582.04,6096.25 4584.83,6093.47 4584.83,6084.04 4587.61,6081.25 4597.79,6081.25 4600.57,6084.04 4600.57,6093.47 4603.36,6096.25 4613.54,6096.25 4616.32,6093.47 4616.32,6084.04 4619.11,6081.25 4629.29,6081.25 4632.07,6084.04 4632.07,6093.47 4634.85,6096.25 4645.03,6096.25 4647.82,6093.47 4647.82,6084.04 4650.6,6081.25 4660.78,6081.25 4663.57,6084.04 4663.57,6093.47 4666.35,6096.25 4981.25,6096.25 5049.8,6027.71 U5.36@5049.8,5869.44
SD_BA0: U1.K12 U5.20 | length 1708.5
  Top Layer w10: U1.K12@4087.55,5645.07 4100.38,5632.25 v1(4102.25,5632.25) ; U5.20@5081.3,5425.19 5082.31,5424.16 v1(5082.31,5377.31)
  Bottom Layer w3.94: v1(4102.25,5632.25) 4119.61,5632.25 4122.4,5629.47 4122.4,5615.46 4125.18,5612.68 4135.36,5612.68 4138.14,5615.46 4138.14,5629.47 4140.93,5632.25 4151.11,5632.25 4153.89,5629.47 4153.89,5615.46 4156.68,5612.68 4166.86,5612.68 4169.64,5615.46 4169.64,5629.47 4172.42,5632.25 4182.6,5632.25 4185.39,5629.47 4185.39,5615.46 4188.17,5612.68 4198.35,5612.68 4201.14,5615.46 4201.14,5629.47 4203.92,5632.25 4214.1,5632.25 4216.88,5629.47 4216.88,5615.46 4219.67,5612.68 4229.85,5612.68 4232.63,5615.46 4232.63,5629.47 4235.42,5632.25 4245.6,5632.25 4248.38,5629.47 4248.38,5615.46 4251.16,5612.68 4261.34,5612.68 4264.13,5615.46 4264.13,5629.47 4266.91,5632.25 4277.09,5632.25 4279.88,5629.47 4279.88,5615.46 4282.66,5612.68 4292.84,5612.68 4295.62,5615.46 4295.62,5629.47 4298.41,5632.25 4308.59,5632.25 4311.37,5629.47 4311.37,5615.46 4314.16,5612.68 4324.34,5612.68 4327.12,5615.46 4327.12,5629.47 4329.9,5632.25 4340.08,5632.25 4342.87,5629.47 4342.87,5615.46 4345.65,5612.68 4355.83,5612.68 4358.62,5615.46 4358.62,5629.47 4361.4,5632.25 4371.58,5632.25 4374.36,5629.47 4374.36,5615.46 4377.15,5612.68 4387.33,5612.68 4390.11,5615.46 4390.11,5629.47 4392.9,5632.25 4403.08,5632.25 4405.86,5629.47 4405.86,5615.46 4408.64,5612.68 4418.82,5612.68 4421.61,5615.46 4421.61,5629.47 4424.39,5632.25 4434.57,5632.25 4437.36,5629.47 4437.36,5615.46 4440.14,5612.68 4450.32,5612.68 4453.1,5615.46 4453.1,5629.47 4455.89,5632.25 4466.07,5632.25 4468.85,5629.47 4468.85,5615.46 4471.64,5612.68 4481.82,5612.68 4484.6,5615.46 4484.6,5629.47 4487.38,5632.25 4497.57,5632.25 4500.35,5629.47 4500.35,5615.46 4503.13,5612.68 4513.31,5612.68 4516.1,5615.46 4516.1,5629.47 4518.88,5632.25 4529.06,5632.25 4531.85,5629.47 4531.85,5615.46 4534.63,5612.68 4544.81,5612.68 4547.59,5615.46 4547.59,5629.47 4550.38,5632.25 4560.56,5632.25 4563.34,5629.47 4563.34,5615.46 4566.12,5612.68 4576.31,5612.68 4579.09,5615.46 4579.09,5629.47 4581.87,5632.25 4592.05,5632.25 4594.84,5629.47 4594.84,5615.46 4597.62,5612.68 4607.8,5612.68 4610.59,5615.46 4610.59,5629.47 4613.37,5632.25 4623.55,5632.25 4626.33,5629.47 4626.33,5615.46 4629.12,5612.68 4639.3,5612.68 4642.08,5615.46 4642.08,5629.47 4644.87,5632.25 4827.38,5632.25 v1(5082.31,5377.31)
SD_BA1: U1.L12 U5.21 | length 1673.6
  Top Layer w10: U1.L12@4087.55,5613.57 4102.31,5598.81 v1(4102.31,5597.31) ; v1(5112.78,5377.31) U5.21@5112.78,5425.19
  Bottom Layer w3.94: v1(4102.31,5597.31) 4078.55,5621.08 4078.55,5642.07 4107.69,5671.21 4154.65,5671.21 4160.76,5677.31 4295.2,5677.31 4297.99,5680.1 4297.99,5689.53 4300.77,5692.31 4310.95,5692.31 4313.73,5689.53 4313.73,5680.1 4316.52,5677.31 4326.7,5677.31 4329.48,5680.1 4329.48,5689.53 4332.27,5692.31 4342.45,5692.31 4345.23,5689.53 4345.23,5680.1 4348.01,5677.31 4358.19,5677.31 4360.98,5680.1 4360.98,5689.53 4363.76,5692.31 4373.94,5692.31 4376.73,5689.53 4376.73,5680.1 4379.51,5677.31 4389.69,5677.31 4392.47,5680.1 4392.47,5689.53 4395.26,5692.31 4405.44,5692.31 4408.22,5689.53 4408.22,5680.1 4411.01,5677.31 4421.19,5677.31 4423.97,5680.1 4423.97,5689.53 4426.75,5692.31 4436.93,5692.31 4439.72,5689.53 4439.72,5680.1 4442.5,5677.31 4452.68,5677.31 4455.47,5680.1 4455.47,5689.53 4458.25,5692.31 4468.43,5692.31 4471.21,5689.53 4471.21,5680.1 4474,5677.31 4484.18,5677.31 4486.96,5680.1 4486.96,5689.53 4489.75,5692.31 4499.93,5692.31 4502.71,5689.53 4502.71,5680.1 4505.49,5677.31 4515.67,5677.31 4518.46,5680.1 4518.46,5689.53 4521.24,5692.31 4531.42,5692.31 4534.21,5689.53 4534.21,5680.1 4536.99,5677.31 4547.17,5677.31 4549.95,5680.1 4549.95,5689.53 4552.74,5692.31 4562.92,5692.31 4565.7,5689.53 4565.7,5680.1 4568.49,5677.31 4578.67,5677.31 4581.45,5680.1 4581.45,5689.53 4584.23,5692.31 4594.41,5692.31 4597.2,5689.53 4597.2,5680.1 4599.98,5677.31 4610.16,5677.31 4612.95,5680.1 4612.95,5689.53 4615.73,5692.31 4625.91,5692.31 4628.69,5689.53 4628.69,5680.1 4631.48,5677.31 4641.66,5677.31 4644.44,5680.1 4644.44,5689.53 4647.23,5692.31 4657.41,5692.31 4660.19,5689.53 4660.19,5680.1 4662.97,5677.31 4673.16,5677.31 4675.94,5680.1 4675.94,5689.53 4678.72,5692.31 4688.9,5692.31 4691.69,5689.53 4691.69,5680.1 4694.47,5677.31 4704.65,5677.31 4707.44,5680.1 4707.44,5689.53 4710.22,5692.31 4720.4,5692.31 4723.18,5689.53 4723.18,5680.1 4725.97,5677.31 4736.15,5677.31 4738.93,5680.1 4738.93,5689.53 4741.72,5692.31 4751.9,5692.31 4754.68,5689.53 4754.68,5680.1 4757.46,5677.31 4767.64,5677.31 4770.43,5680.1 4770.43,5689.53 4773.21,5692.31 4783.39,5692.31 4786.18,5689.53 4786.18,5680.1 4788.96,5677.31 4812.78,5677.31 v1(5112.78,5377.31)
SD_CAS_N: U1.R13 U5.17 | length 1697.4
  Top Layer w10: U1.R13@4119.05,5487.6 4119.05,5485.72 v1(4130.41,5474.35) ; v1(4986.81,5377.31) U5.17@4986.81,5425.19
  Bottom Layer w3.94: v1(4130.41,5474.35) 4356.54,5248.22 4388.81,5248.22 4391.59,5251 4391.59,5269.53 4394.38,5272.31 4404.56,5272.31 4407.34,5269.53 4407.34,5251 4410.12,5248.22 4420.3,5248.22 4423.09,5251 4423.09,5269.53 4425.87,5272.31 4436.05,5272.31 4438.84,5269.53 4438.84,5251 4441.62,5248.22 4451.8,5248.22 4454.58,5251 4454.58,5269.53 4457.37,5272.31 4467.55,5272.31 4470.33,5269.53 4470.33,5251 4473.12,5248.22 4483.3,5248.22 4486.08,5251 4486.08,5269.53 4488.86,5272.31 4499.04,5272.31 4501.83,5269.53 4501.83,5251 4504.61,5248.22 4514.79,5248.22 4517.58,5251 4517.58,5269.53 4520.36,5272.31 4530.54,5272.31 4533.32,5269.53 4533.32,5251 4536.11,5248.22 4546.29,5248.22 4549.07,5251 4549.07,5269.53 4551.86,5272.31 4562.04,5272.31 4564.82,5269.53 4564.82,5251 4567.6,5248.22 4577.78,5248.22 4580.57,5251 4580.57,5269.53 4583.35,5272.31 4593.53,5272.31 4596.32,5269.53 4596.32,5251 4599.1,5248.22 4609.28,5248.22 4612.06,5251 4612.06,5269.53 4614.85,5272.31 4625.03,5272.31 4627.81,5269.53 4627.81,5251 4630.6,5248.22 4640.78,5248.22 4643.56,5251 4643.56,5269.53 4646.34,5272.31 4656.52,5272.31 4659.31,5269.53 4659.31,5251 4662.09,5248.22 4672.27,5248.22 4675.06,5251 4675.06,5269.53 4677.84,5272.31 4688.02,5272.31 4690.8,5269.53 4690.8,5251 4693.59,5248.22 4703.77,5248.22 4706.55,5251 4706.55,5269.53 4709.34,5272.31 4719.52,5272.31 4722.3,5269.53 4722.3,5251 4725.08,5248.22 4735.27,5248.22 4738.05,5251 4738.05,5269.53 4740.83,5272.31 4751.01,5272.31 4753.8,5269.53 4753.8,5251 4756.58,5248.22 4766.76,5248.22 4769.55,5251 4769.55,5269.53 4772.33,5272.31 4782.51,5272.31 4785.29,5269.53 4785.29,5251 4788.08,5248.22 4798.26,5248.22 4801.04,5251 4801.04,5269.53 4803.82,5272.31 4814.01,5272.31 4816.79,5269.53 4816.79,5251 4819.57,5248.22 4829.75,5248.22 4832.54,5251 4832.54,5269.53 4835.32,5272.31 4845.5,5272.31 4848.29,5269.53 4848.29,5251 4851.07,5248.22 4862.88,5248.22 4986.81,5372.15 v1(4986.81,5377.31)
SD_CLK: R2.2 U1.J15 | length 114.8
  Top Layer w3.94: U1.J15@4182.03,5676.56 4197.78,5692.31 R2.2@4290.27,5692.31
SD_CS_N: U1.R15 U5.19 | length 1692.7
  Top Layer w10: v1(4167.31,5472.31) 4182.03,5487.03 U1.R15@4182.03,5487.6 ; v1(5049.8,5377.31) U5.19@5049.8,5425.19
  Bottom Layer w3.94: v1(4167.31,5472.31) 4172.31,5472.31 4172.31,5497.31 4148.14,5521.49 4125.76,5521.49 4113.46,5533.79 4113.46,5545.13 4124.5,5556.17 4129.5,5556.17 4134.5,5561.17 4199.86,5561.17 4202.65,5563.96 4202.65,5576.93 4205.43,5579.71 4215.61,5579.71 4218.39,5576.93 4218.39,5563.96 4221.18,5561.17 4231.36,5561.17 4234.14,5563.96 4234.14,5576.93 4236.93,5579.71 4247.11,5579.71 4249.89,5576.93 4249.89,5563.96 4252.67,5561.17 4262.85,5561.17 4265.64,5563.96 4265.64,5576.93 4268.42,5579.71 4278.6,5579.71 4281.39,5576.93 4281.39,5563.96 4284.17,5561.17 4294.35,5561.17 4297.13,5563.96 4297.13,5576.93 4299.92,5579.71 4310.1,5579.71 4312.88,5576.93 4312.88,5563.96 4315.67,5561.17 4325.85,5561.17 4328.63,5563.96 4328.63,5576.93 4331.41,5579.71 4341.6,5579.71 4344.38,5576.93 4344.38,5563.96 4347.16,5561.17 4357.34,5561.17 4360.13,5563.96 4360.13,5576.93 4362.91,5579.71 4373.09,5579.71 4375.88,5576.93 4375.88,5563.96 4378.66,5561.17 4388.84,5561.17 4391.62,5563.96 4391.62,5576.93 4394.41,5579.71 4404.59,5579.71 4407.37,5576.93 4407.37,5563.96 4410.15,5561.17 4420.34,5561.17 4423.12,5563.96 4423.12,5576.93 4425.9,5579.71 4436.08,5579.71 4438.87,5576.93 4438.87,5563.96 4441.65,5561.17 4451.83,5561.17 4454.62,5563.96 4454.62,5576.93 4457.4,5579.71 4467.58,5579.71 4470.36,5576.93 4470.36,5563.96 4473.15,5561.17 4483.33,5561.17 4486.11,5563.96 4486.11,5576.93 4488.9,5579.71 4499.08,5579.71 4501.86,5576.93 4501.86,5563.96 4504.64,5561.17 4514.82,5561.17 4517.61,5563.96 4517.61,5576.93 4520.39,5579.71 4530.57,5579.71 4533.36,5576.93 4533.36,5563.96 4536.14,5561.17 4546.32,5561.17 4549.1,5563.96 4549.1,5576.93 4551.89,5579.71 4562.07,5579.71 4564.85,5576.93 4564.85,5563.96 4567.64,5561.17 4577.82,5561.17 4580.6,5563.96 4580.6,5576.93 4583.38,5579.71 4593.56,5579.71 4596.35,5576.93 4596.35,5563.96 4599.13,5561.17 4609.31,5561.17 4612.1,5563.96 4612.1,5576.93 4614.88,5579.71 4625.06,5579.71 4627.84,5576.93 4627.84,5563.96 4630.63,5561.17 4640.81,5561.17 4643.59,5563.96 4643.59,5576.93 4646.38,5579.71 4656.56,5579.71 4659.34,5576.93 4659.34,5563.96 4662.12,5561.17 4672.3,5561.17 4675.09,5563.96 4675.09,5576.93 4677.87,5579.71 4688.05,5579.71 4690.84,5576.93 4690.84,5563.96 4693.62,5561.17 4865.13,5561.17 5043.98,5382.31 5044.8,5382.31 v1(5049.8,5377.31)
SD_DQ0: U1.L15 U5.2 | length 983.7
  Top Layer w3.94: U1.L15@4182.03,5613.57 4197.07,5598.54 4231.21,5598.54 4233.99,5595.75 4233.99,5595.1 4236.78,5592.31 4246.96,5592.31 4249.74,5595.1 4249.74,5595.75 4252.52,5598.54 4262.7,5598.54 4265.49,5595.75 4265.49,5595.1 4268.27,5592.31 4278.45,5592.31 4281.24,5595.1 4281.24,5595.75 4284.02,5598.54 4294.2,5598.54 4296.98,5595.75 4296.98,5595.1 4299.77,5592.31 4309.95,5592.31 4312.73,5595.1 4312.73,5595.75 4315.52,5598.54 4325.7,5598.54 4328.48,5595.75 4328.48,5595.1 4331.26,5592.31 4341.44,5592.31 4344.23,5595.1 4344.23,5595.75 4347.01,5598.54 4357.19,5598.54 4359.98,5595.75 4359.98,5595.1 4362.76,5592.31 4372.94,5592.31 4375.72,5595.1 4375.72,5595.75 4378.51,5598.54 4388.69,5598.54 4391.47,5595.75 4391.47,5595.1 4394.26,5592.31 4404.44,5592.31 4407.22,5595.1 4407.22,5595.75 4410,5598.54 4421.81,5598.54 4451.75,5628.47 4456.16,5628.47 4457.31,5627.31 4457.31,5617.31 4424.92,5584.92 4424.92,5579.71 4427.31,5577.31 4439.16,5577.31 4464.16,5602.31 4476.34,5602.31 4479.13,5599.53 4479.13,5595.59 4447.31,5563.78 4447.31,5557.31 4452.31,5552.31 4455.88,5552.31 4493.66,5590.1 4511.58,5590.1 4514.36,5587.31 4514.36,5583.6 4472.31,5541.55 4472.31,5532.31 4477.31,5527.31 4487.31,5527.31 4515.1,5555.1 4519.53,5555.1 4522.31,5552.31 4522.31,5546.31 4492.31,5516.31 4492.31,5512.31 4497.31,5507.31 4502.31,5507.31 4532.31,5537.31 4547.97,5537.31 4552.73,5532.56 4552.73,5528.63 4514.36,5490.27 U5.2@4514.36,5430.19
SD_DQ1: U1.M16 U5.4 | length 983
  Top Layer w3.94: U1.M16@4213.53,5582.07 4222.03,5573.58 4232.3,5573.58 4233.8,5572.07 4347.56,5572.07 4359.41,5560.22 4352.66,5553.46 4317.31,5553.46 4314.53,5550.68 4314.53,5546.74 4317.31,5543.96 4350.67,5543.96 4352.31,5542.31 4352.31,5536.86 4344.53,5529.08 4344.53,5525.14 4347.31,5522.36 4397.27,5522.36 4401.49,5518.14 4401.49,5511.49 4396.49,5506.49 4362.31,5506.49 4359.76,5503.94 4359.76,5500.32 4362.31,5497.77 4397.27,5497.77 4397.27,5488.56 4396.6,5487.88 4357.31,5487.88 4354.53,5485.1 4354.53,5481.16 4357.31,5478.38 4397.27,5478.38 4422.31,5503.42 4422.31,5522.31 4425.1,5525.1 4439.53,5525.1 4442.31,5522.31 4442.31,5492.31 4437.31,5487.31 4437.31,5479.28 4442.04,5474.56 4442.04,5463.54 4437.31,5458.81 4437.31,5447.79 4442.04,5443.06 4442.04,5432.04 4437.31,5427.31 4437.31,5382.31 4482.31,5337.31 4547.31,5337.31 4577.35,5367.35 U5.4@4577.35,5430.19